# Altium PCB Chopper PMDC.PcbDoc (part 1 of 2)
Units mm, origin at the board's own origin, x right, y up, seen from the top; angles counter-clockwise.
Board outline 47.75 x 46.74 mm, 2 copper layers (Top Layer, Bottom Layer); 58 components, 29 nets, 163 pads, 6 vias.
Unrouted connection lines stored in the file: 2.
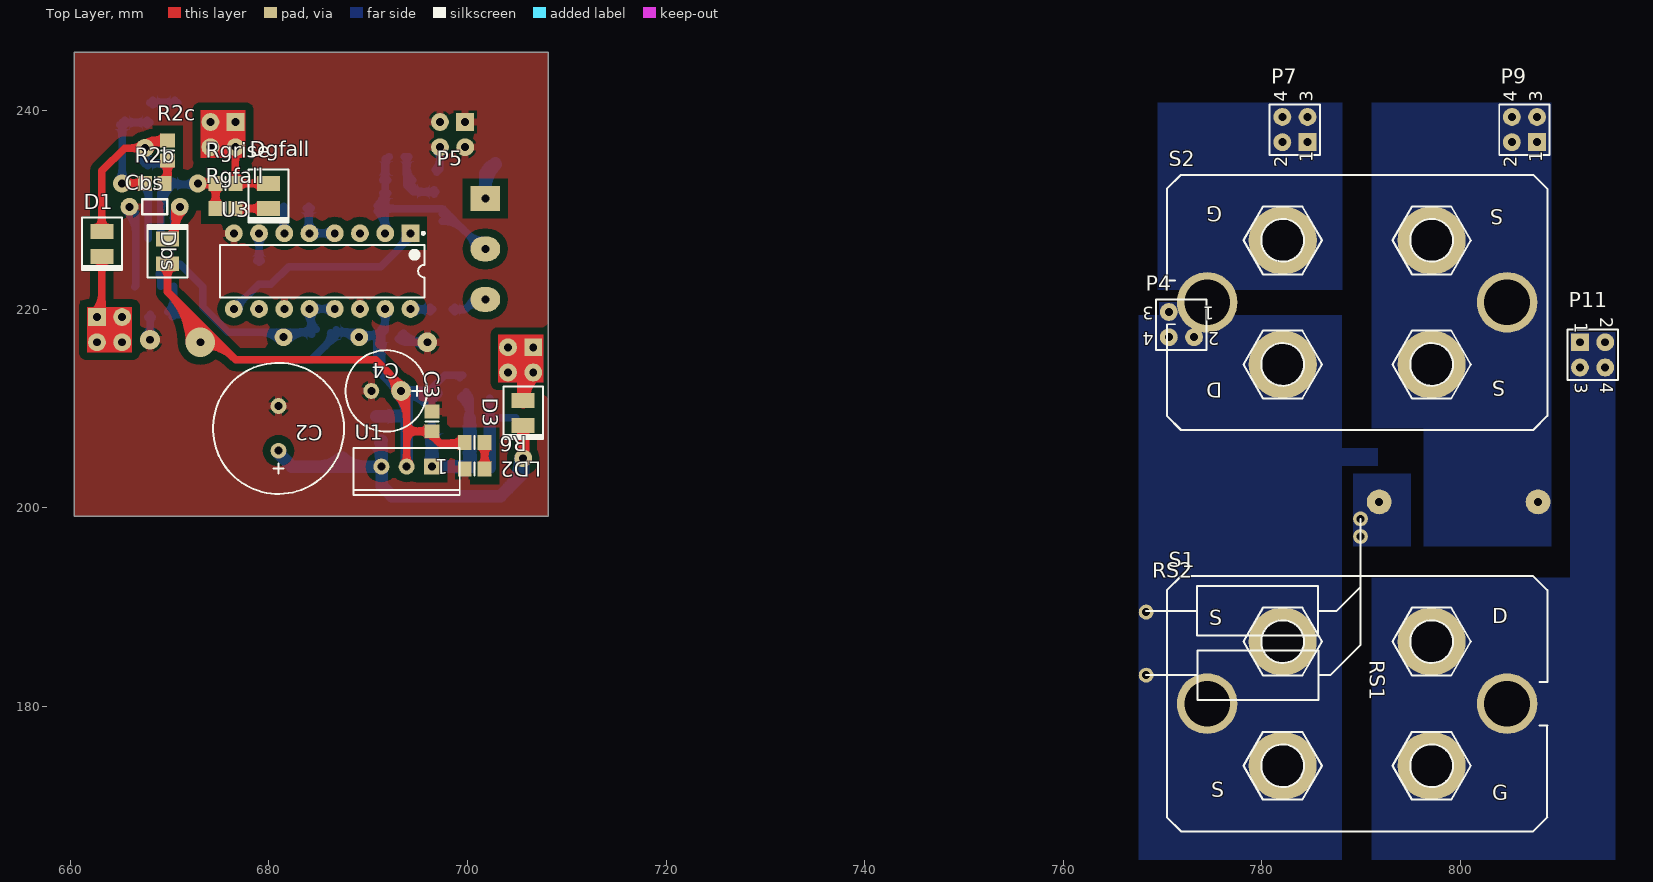
[diagram p0: Top Layer view]
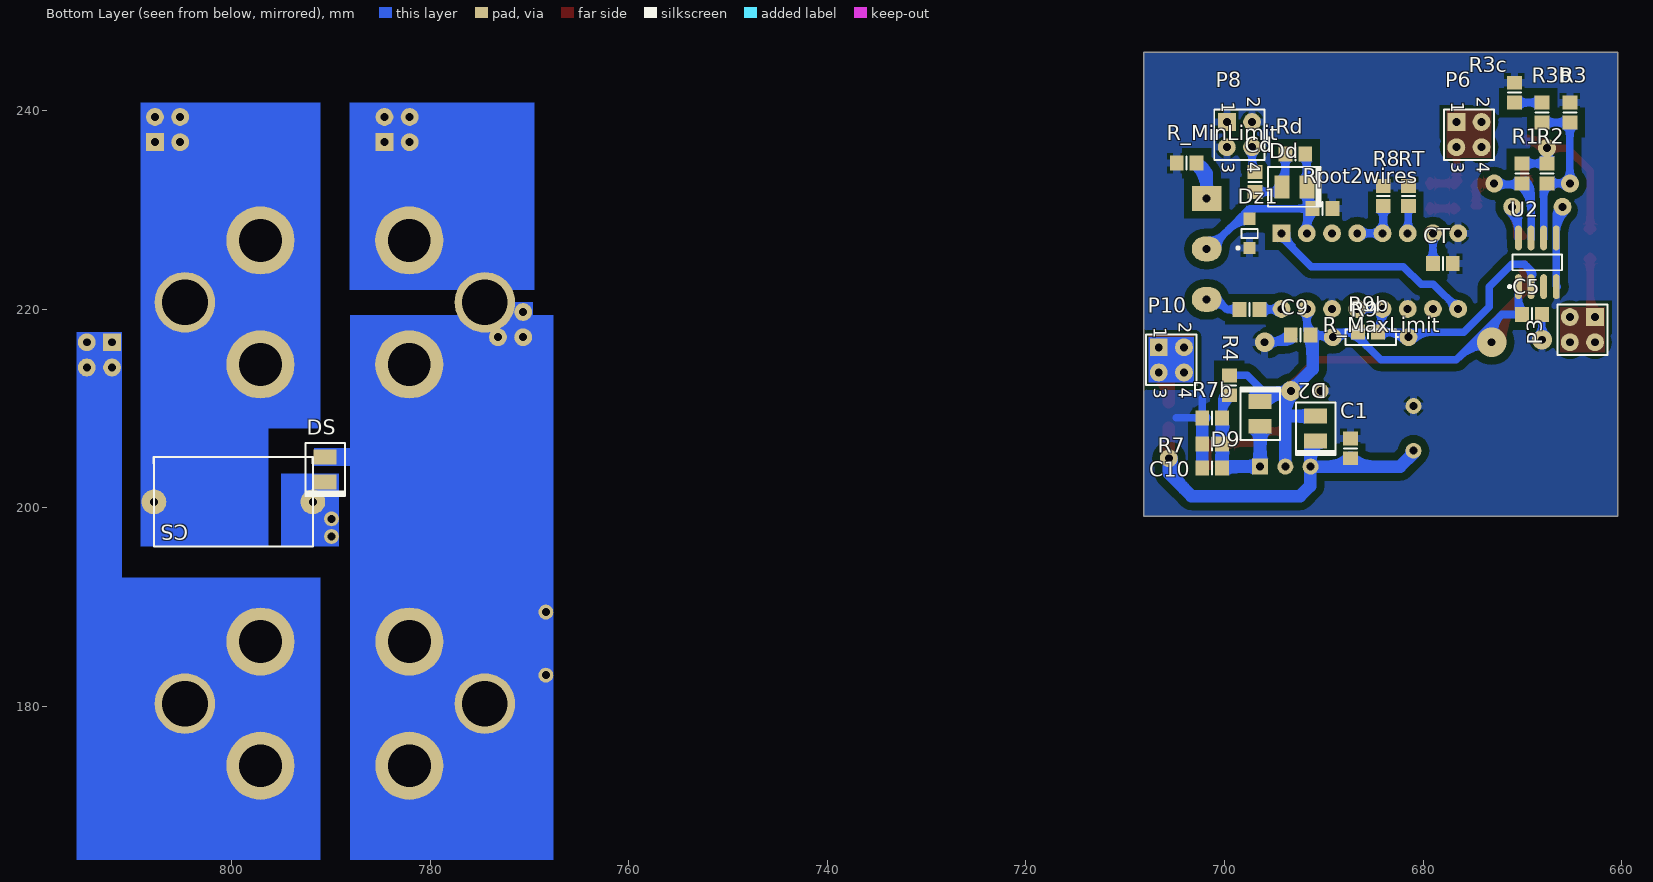
[diagram p1: Bottom Layer view, seen from below]

## Layer stack, top to bottom
Top Layer: signal copper 0.0356
Dielectric: dielectric 0.32, FR-4, Dk 4.8
Bottom Layer: signal copper 0.0356

## Board outline
660.4,245.872 660.4,199.136 708.152,199.136 708.152,245.872

## Design rules (kind name [scope] priority, off if disabled: settings)
Clearance [All] p1: gap=0.762
HoleSize [All] p1: absolutevalues=TRUE maxlimit=6 minlimit=0.8 maxpercent=80.000 minpercent=20.000
PlaneClearance [All] p1: clearance=1.016
PlaneConnect [All] p1: planeconnectstyle=Relief reliefexpansion=0.508 reliefentries=4 reliefconductorwidth=0.762 reliefairgap=0.254
PolygonConnect [All] p1: connectstyle=Relief reliefconductorwidth=0.762 reliefentries=4 polygonreliefangle="90 Angle"
RoutingVias [All] p1: holewidth=0.711 width=1.27 viastyle="Through Hole" minholewidth=0.711 minwidth=1.27 maxholewidth=0.711 maxwidth=1.27
SilkscreenOverComponentPads [IsPad] p1: minsilkscreentomaskgap=0.254
SolderMaskExpansion [All] p1: expansion=0.102
Width [All] p1: maxlimit=1.27 minlimit=0.254 preferedwidth=0.762
24 further rules are at their usual default settings.

## Components (designator, comment, footprint, x,y, rotation, side; value= is the part's Value field where it differs from the comment)
C1 "Cap" 6-0805_M 687.324,205.978 r270 bottom
C2 "Cap" CAPELTR-RAD6.6-DPP4.5 680.974,210.24 r270 top
C3 "Cap" 6-0805_M 696.417,208.696 r270 top
C4 "Cap" CAPELTR-RAD4.1-DPP3.0 690.321,211.76 r0 top
C5 "Cap" 6-0805_M 669.052,219.456 r180 bottom
C9 "Cap" 6-0805_M 692.337,217.398 r0 bottom
C10 "Cap" 6-0805_M 701.243,204.013 r180 bottom
Cbs "Cer" 100nF 665.963,230.302 r0 top
Cd "Cap" 6-0805_M 696.925,232.8 r90 bottom
CS "Cap" "CAPACITOR 4U7 100V" 807.82,213.084 r180 bottom
CT "Cap" 6-0805_M 678.018,224.587 r180 bottom
D1 "BYD77" SOD87 663.194,226.568 r270 top
D2 "BYD77" SOD87 690.829,207.967 r270 bottom
D3 "Diode 1N4002" SOD87 705.612,209.55 r270 top
D9 "1N4002" SOD87 696.417,209.457 r90 bottom
Dbs "" SOD87 669.798,225.823 r90 top
Dd "nc" SOD87 692.971,232.308 r180 bottom
Dgfall "BYD77" SOD87 679.958,231.394 r270 top
DS "BYD77" SOD87 790.575,203.852 r270 bottom
Dz1 "5V" ONSC-SOD-123FL-2-498_V 697.484,227.633 r90 bottom
LD2 "RED" 6-0805_M 700.735,203.886 r180 top
P3 "Header 2X2" HDR2X2 662.686,219.202 r0 bottom
P4 "Header 2X2" HDR2X2 773.176,219.71 r180 top
P5 "WE-Terminal Blocks Screw Type 691103110003" t-block 701.802,226.06 r270 top
P6 "Header 2X2" HDR2X2 676.656,238.844 r270 bottom
P7 "Header 2X2" HDR2X2 784.606,236.812 r90 top
P8 "Header 2X2" HDR2X2 699.77,238.844 r270 bottom
P9 "Header 2X2" HDR2X2 807.72,236.812 r90 top
P10 "Header 2X2" HDR2X2 706.628,216.154 r270 bottom
P11 "Header 2X2" HDR2X2 812.038,216.662 r270 top
R1 "1%" 6-0805_M 670.052,233.664 r270 bottom
R2 "1%" 6-0805_M 667.512,233.664 r270 bottom
R2b "1%" 6-0805_M 668.512,232.664 r180 top
R2c "1%" 6-0805_M 669.798,235.982 r270 top
R3 "1%" 6-0805_M 665.226,239.792 r90 bottom
R3b "1%" 6-0805_M 668.02,239.792 r90 bottom
R3c "1%" 6-0805_M 670.814,241.792 r270 bottom
R4 "Res1" 6-0805_M 699.516,212.328 r270 bottom
R6 "Res1" 6-0805_M 700.735,206.553 r180 top
R7 "Res1" 6-0805_M 701.243,206.426 r180 bottom
R7b "Res1" 6-0805_M 701.243,209.042 r180 bottom
R8 "Res1" 6-0805_M 684.022,231.378 r90 bottom
R9 "Res1" AXIAL-0.3 685.292,217.17 r180 bottom
R9b "Res1" 6-0805_M 685.546,217.678 r180 bottom
R_MaxLimit "Res1" 6-0805_M 697.484,219.964 r0 bottom
R_MinLimit "Res1" 6-0805_M 703.818,234.696 r0 bottom
Rd "Res1" 6-0805_M 692.877,235.61 r0 bottom
Rgfall "Res1" 6-0805_M 675.64,230.124 r180 top
Rgrise "Res1" 6-0805_M 675.64,232.664 r180 top
Rpot2wires "Res1" 6-0805_M 690.134,230.124 r180 bottom
RS1 "Res1" "Axial 0.8"#1 789.62,183.134 r180 top
RS2 "Res1" "Axial 0.8"#2 789.559,189.611 r180 top
RT "Res1" 6-0805_M 681.482,231.378 r90 bottom
S1 "IXFN420N10T" SOT-227B 789.597,180.264 r0 top
S2 "IXFN420N10T" SOT-227B 789.597,220.675 r180 top
U1 "TL783" TO-220AB 693.877,204.14 r180 top
U2 "IR2127S" SO8_M 668.503,224.714 r90 bottom
U3 "SG3524N" DIP-16 685.368,223.825 r270 top

## Footprints (in the part's own frame and the unit in brackets; to place one, negate y for a bottom-side part, rotate by r counter-clockwise, add the part's x,y. Pads: shape width x height; smd on the part's side, far side on the other; paste and mask are expansions set on the pad)
6-0805_M [mm] "Chip Resistor, Body 2.0x1.2mm, IPC Low Density"
  rect 1.4x1.5 smd: 1(-1,0) 2(1,0)
  silkscreen extent 0,-0.65 0,0.65, body extent -1.07,-0.7 1.07,0.7, height 0.7
100nF [mm]
  round 1.8 hole 0.8: 1(0,0) 2(5.08,0)
  silkscreen extent 1.27,-0.76 3.81,0.76
"Axial 0.8"#1 [mm]
  round 1.5 hole 0.8: 1(-0.32,-13.97) 2(21.27,0)
  silkscreen extent -0.32,-15.75 21.27,2.5
"Axial 0.8"#2 [mm]
  round 1.5 hole 0.8: 1(-0.381,-9.271) 2(21.209,0.127)
  silkscreen extent -0.38,-7.49 21.21,2.5
AXIAL-0.3 [mm] "Axial Device, Thru-Hole; 2 Leads; 0.3 in Pin Spacing"
  round 1.8 hole 0.8: 1(-3.81,0) 2(3.81,0)
  silkscreen extent -2.77,-0.76 2.77,0.76
"CAPACITOR 4U7 100V" [mm]
  round 2.5 hole 0.8: 1(0,-12.5) 2(16,-12.5)
  silkscreen extent 0,-17 16,-8
CAPELTR-RAD4.1-DPP3.0 [mm] "Capacitor Eletrolitico Radial 4.1mm com 3.0mm entre pinos"
  round 1.6 hole 0.8: 1(0,0)
  round 2 hole 0.8: 2(3,0)
  silkscreen extent -2.6,-4.1 5.6,4.1
CAPELTR-RAD6.6-DPP4.5 [mm] "Capacitor Eletrolitico Radial 6.6mm com 4.5mm entre pinos"
  round 1.6 hole 0.8: 1(0,0) 2(4.5,0)
  silkscreen extent -4.35,-6.6 8.85,6.6
DIP-16 [mm] "DIP; 16 Leads; Row Spacing 7.62 mm; Pitch 2.54 mm"
  rect 1.8x1.8 hole 0.8: 1(-3.81,8.89)
  round 1.8 hole 0.8: 2(-3.81,6.35) 3(-3.81,3.81) 4(-3.81,1.27) 5(-3.81,-1.27) 6(-3.81,-3.81) 7(-3.81,-6.35) 8(-3.81,-8.89) 9(3.81,-8.89) 10(3.81,-6.35) 11(3.81,-3.81) 12(3.81,-1.27) 13(3.81,1.27) 14(3.81,3.81) 15(3.81,6.35) 16(3.81,8.89)
  silkscreen extent -3.93,-10.3 2.65,10.32, body extent -3.6,-10.28 3.6,10.28, height 5.08
HDR2X2 [mm] "Connector; Header; 2x2 Position"
  rect 1.8x1.8 hole 0.8: 1(0,0)
  round 1.8 hole 0.8: 2(0,2.54) 3(2.54,0) 4(2.54,2.54)
  silkscreen extent -1.27,-1.27 3.81,3.81
ONSC-SOD-123FL-2-498_V [mm] "SOD, 2-Leads, Body 2.7x1.65mm"
  rect 1.25x1.22 smd: 1(-1.475,0) 2(1.475,0)
  silkscreen extent -1.6,-0.82 0.45,1.29, body extent -1.35,-0.82 1.35,0.82, height 0.98
SO8_M [mm] "SOIC, 8-Leads, Body 4.9x3.9mm, Pitch 1.27mm, IPC Low Density"
  oval 2.5x0.7 smd: 1(-2.45,1.905) 2(-2.45,0.635) 3(-2.45,-0.635) 4(-2.45,-1.905) 5(2.45,-1.905) 6(2.45,-0.635) 7(2.45,0.635) 8(2.45,1.905)
  silkscreen extent -2.57,-2.5 0.8,2.93, body extent -2,-2.5 2,2.5, height 1.75
SOD87 [mm]
  rect 1.5x2.3 smd: A(-1.253,0) K(1.253,0)
  silkscreen extent -2.65,-2.01 2.65,2.01
SOT-227B [mil] "SOT-227; 4 Screw Terminals, 2 Mounting Holes"
  round 270 hole 170 unplated: 1(-295.21,-246) 1(-295.21,246) 2(295,-246) 3(295,246)
  round 240.16 hole 181.1: MH1(-594.49,0) MH2(594.49,0)
  silkscreen extent -754,-506 754,506
t-block [mm]
  rect 2.5x3 hole 0.8 unplated: 1(-5.08,0)
  oval 2.5x3 hole 0.8 unplated: 2(0,0) 3(5.08,0)
TO-220AB [mm] "TO, Thru-Hole, Vertical, Heatsink Mounted; 3 In-Line Leads; Pitch 2.54 mm"
  rect 1.6x1.6 hole 0.8: 1(-2.54,0)
  round 1.6 hole 0.8: 2(0,0) 3(2.54,0)
  silkscreen extent -5.35,-1.85 5.35,2.85

## Part data
C1 C2 C3 C4 C5 C9 C10 Cd CS CT: "Capacitor"
Cbs: library part Cap, "Capacitor"
D1 D2 D9 Dbs Dd Dgfall: library part "Diode 1N4002", "1 Amp General Purpose Rectifier"
D3: "1 Amp General Purpose Rectifier"
DS: library part Diode, "Default Diode"
Dz1: library part "D Zener", "Zener Diode"
LD2: library part LED, "Diodo Emissor de Luz"
P3 P4 P6 P7 P8 P9 P10 P11: "Header, 2-Pin, Dual row"
P5: "WR-TBL 3.50 mm Wire Protector system"
R1 R2 R2b R2c R3 R3b R3c: library part Res1, "Resistor"
R4 R6 R7 R7b R8 R9 R9b R_MaxLimit R_MinLimit Rd Rgfall Rgrise Rpot2wires RS1 RS2 RT: "Resistor"
S1 S2: library part MOSFET-N, "N-Channel MOSFET"
U1: library part L7805ACV, "Precision 1A Regulator"
U2: "Current Sensing Single Channel Driver"
U3: "Regulating Pulse-Width Modulator with Voltage Control, 45 % Duty Cycle, 0 to +70 degC, 16-pin PDIP (N), Pb-Free (RoHS)"

## Free pads (board coordinates)
  round 1.8 hole 0.8: 0(705.612,204.978)

## Via types
v1: diameter 1.8, hole 0.8, Top Layer to Bottom Layer, 3 vias
v2: diameter 2, hole 0.8, Top Layer to Bottom Layer, 2 vias
v3: diameter 3, hole 0.8, Top Layer to Bottom Layer, 1 vias

## Nets (pads, with @x,y where several pads share a name; then routed paths per layer and width w, separated by ;. In a path a pad name is that pad's centre, name@x,y a point inside that pad or via, vN(x,y) a via of type N, cw(c..) or ccw(c..) an arc to the next point about the centre after c; other vN are vias at no path point)
+15V: C3.2 C4.2 C5.1 C9.1 D2.A D9.K Dbs.A R4.1 R6.2 R9.1 R9b.1 U1.2 U2.1 U3.15 | length 369.7
  Top Layer w0.762: C4.2@693.674,211.582 693.674,211.76 693.674,211.96 693.598,212.036 690.75,214.884 676.656,214.884 673.989,217.551 669.798,221.742 Dbs.A@669.798,224.57 669.798,223.774 ; U1.2@693.877,204.14 693.877,207.696 ; C4.2@693.928,211.836 693.877,211.887 693.877,211.76 693.877,207.696 ; C3.2@696.417,207.823 C3.2@696.417,207.696 ; R6.2@699.43,206.502 697.23,206.502 696.417,207.315 C3.2@696.417,207.696 ; Dbs.A@669.537,224.309 cw(c668.907,223.679) 669.798,223.679 ; Dbs.A@669.537,224.309 cw(c668.907,223.679) 669.798,223.679 ; Dbs.A@669.537,224.309 cw(c668.907,223.679) 669.798,223.679 ; Dbs.A@669.537,224.309 cw(c668.907,223.679) 669.798,223.679 ; Dbs.A@669.56,224.288 cw(c669.125,223.774) 669.798,223.774 ; Dbs.A@669.56,224.288 cw(c669.125,223.774) 669.798,223.774 ; Dbs.A@669.56,224.288 cw(c669.125,223.774) 669.798,223.774 ; Dbs.A@669.56,224.288 cw(c669.125,223.774) 669.798,223.774 ; 669.798,223.679 cw(c670.689,223.679) Dbs.A@670.059,224.309 ; 669.798,223.679 cw(c670.689,223.679) Dbs.A@670.059,224.309 ; 669.798,223.679 cw(c670.689,223.679) Dbs.A@670.059,224.309 ; 669.798,223.679 cw(c670.689,223.679) Dbs.A@670.059,224.309 ; 669.798,223.774 cw(c670.471,223.774) Dbs.A@670.036,224.288 ; 669.798,223.774 cw(c670.471,223.774) Dbs.A@670.036,224.288 ; 669.798,223.774 cw(c670.471,223.774) Dbs.A@670.036,224.288 ; 669.798,223.774 cw(c670.471,223.774) Dbs.A@670.036,224.288 ; 669.933,221.607 cw(c664.987,216.662) v3@671.981,216.662 ; 669.933,221.607 cw(c664.987,216.662) v3@671.981,216.662 ; 669.933,221.607 cw(c664.987,216.662) v3@671.981,216.662 ; 669.933,221.607 cw(c664.987,216.662) v3@671.981,216.662 ; 671.233,220.307 cw(c667.589,216.662) v3@672.743,216.662 ; 671.233,220.307 cw(c667.589,216.662) v3@672.743,216.662 ; 671.233,220.307 cw(c667.589,216.662) v3@672.743,216.662 ; 671.233,220.307 cw(c667.589,216.662) v3@672.743,216.662 ; 672.534,219.006 cw(c670.19,216.662) v3@673.505,216.662 ; 672.534,219.006 cw(c670.19,216.662) v3@673.505,216.662 ; 672.534,219.006 cw(c670.19,216.662) v3@673.505,216.662 ; 672.534,219.006 cw(c670.19,216.662) v3@673.505,216.662 ; v3@673.061,217.065 cw(c673.327,214.339) 675.264,216.276 ; v3@673.061,217.065 cw(c673.327,214.339) 675.264,216.276 ; v3@673.061,217.065 cw(c673.327,214.339) 675.264,216.276 ; v3@673.061,217.065 cw(c673.327,214.339) 675.264,216.276 ; v3@673.135,216.307 cw(c673.53,212.261) 676.405,215.135 ; v3@673.135,216.307 cw(c673.53,212.261) 676.405,215.135 ; v3@673.135,216.307 cw(c673.53,212.261) 676.405,215.135 ; v3@673.135,216.307 cw(c673.53,212.261) 676.405,215.135 ; 691.873,213.761 cw(c689.872,211.76) C4.2@692.702,211.76 ; 691.873,213.761 cw(c689.872,211.76) C4.2@692.702,211.76 ; 691.873,213.761 cw(c689.872,211.76) C4.2@692.702,211.76 ; 691.873,213.761 cw(c689.872,211.76) C4.2@692.702,211.76 ; C4.2@692.883,211.322 cw(c690.484,208.923) 693.877,208.923 ; C4.2@692.883,211.322 cw(c690.484,208.923) 693.877,208.923 ; C4.2@692.883,211.322 cw(c690.484,208.923) 693.877,208.923 ; C4.2@692.883,211.322 cw(c690.484,208.923) 693.877,208.923 ; C4.2@693.422,211.861 cw(c692.324,210.763) 693.877,210.763 ; C4.2@693.422,211.861 cw(c692.324,210.763) 693.877,210.763 ; C4.2@693.422,211.861 cw(c692.324,210.763) 693.877,210.763 ; C4.2@693.422,211.861 cw(c692.324,210.763) 693.877,210.763 ; U1.2@693.581,204.436 ccw(c692.866,205.151) 693.877,205.151 ; U1.2@693.581,204.436 ccw(c692.866,205.151) 693.877,205.151 ; U1.2@693.581,204.436 ccw(c692.866,205.151) 693.877,205.151 ; U1.2@693.581,204.436 ccw(c692.866,205.151) 693.877,205.151 ; 693.877,205.151 ccw(c694.889,205.151) U1.2@694.173,204.436 ; 693.877,205.151 ccw(c694.889,205.151) U1.2@694.173,204.436 ; 693.877,205.151 ccw(c694.889,205.151) U1.2@694.173,204.436 ; 693.877,205.151 ccw(c694.889,205.151) U1.2@694.173,204.436 ; 693.877,207.696 C3.2@696.417,207.696 ; 695.597,207.696 cw(c695.597,206.926) C3.2@696.142,207.47 ; 695.597,207.696 ccw(c695.597,208.466) C3.2@696.142,207.921 ; 695.597,207.696 ccw(c695.597,208.466) C3.2@696.142,207.921 ; 695.597,207.696 cw(c695.597,206.926) C3.2@696.142,207.47 ; 695.597,207.696 ccw(c695.597,208.466) C3.2@696.142,207.921 ; 695.597,207.696 cw(c695.597,206.926) C3.2@696.142,207.47 ; 695.597,207.696 ccw(c695.597,208.466) C3.2@696.142,207.921 ; 695.597,207.696 cw(c695.597,206.926) C3.2@696.142,207.47 ; C3.2@696.775,207.613 ccw(c697.669,207.372) 697.014,206.718 ; C3.2@696.775,207.613 ccw(c697.669,207.372) 697.014,206.718 ; C3.2@696.775,207.613 ccw(c697.669,207.372) 697.014,206.718 ; C3.2@696.775,207.613 ccw(c697.669,207.372) 697.014,206.718 ; 698.963,206.502 ccw(c698.963,207.275) R6.2@699.51,206.728 ; 698.963,206.502 ccw(c698.963,207.275) R6.2@699.51,206.728 ; 698.963,206.502 ccw(c698.963,207.275) R6.2@699.51,206.728 ; 698.963,206.502 ccw(c698.963,207.275) R6.2@699.51,206.728 ; 698.967,206.502 cw(c698.967,205.735) R6.2@699.51,206.277 ; 698.967,206.502 cw(c698.967,205.735) R6.2@699.51,206.277 ; 698.967,206.502 cw(c698.967,205.735) R6.2@699.51,206.277 ; 698.967,206.502 cw(c698.967,205.735) R6.2@699.51,206.277
  Bottom Layer w0.762: C5.1@670.408,219.862 U2.1@670.408,222.264 U2.1@670.408,222.314 ; 670.814,219.456 672.084,219.456 673.989,217.551 676.656,214.884 684.276,214.884 686.808,217.416 R9b.1@687.07,217.678 ; U3.15@691.718,220.015 691.718,217.856 691.299,217.436 691.21,217.348 691.134,217.348 689.102,217.348 688.772,217.678 R9b.1@687.07,217.678 ; C4.2@693.536,211.974 C4.2@693.547,211.963 ; 693.598,209.22 693.877,209.22 ; D9.K@696.417,210.71 696.417,211.582 ; R4.1@699.516,213.36 697.738,213.36 696.417,212.039 696.417,211.582 ; C5.1@669.826,219.732 ccw(c668.423,221.135) U2.1@670.408,221.135 ; C5.1@669.826,219.732 ccw(c668.423,221.135) U2.1@670.408,221.135 ; C5.1@669.826,219.732 ccw(c668.423,221.135) U2.1@670.408,221.135 ; C5.1@669.826,219.732 ccw(c668.423,221.135) U2.1@670.408,221.135 ; C5.1@670.278,219.23 cw(c670.822,218.686) 670.822,219.456 ; C5.1@670.278,219.23 cw(c670.822,218.686) 670.822,219.456 ; C5.1@670.278,219.23 cw(c670.822,218.686) 670.822,219.456 ; C5.1@670.278,219.23 cw(c670.822,218.686) 670.822,219.456 ; C5.1@670.278,219.682 ccw(c670.822,220.226) 670.822,219.456 ; C5.1@670.278,219.682 ccw(c670.822,220.226) 670.822,219.456 ; C5.1@670.278,219.682 ccw(c670.822,220.226) 670.822,219.456 ; C5.1@670.278,219.682 ccw(c670.822,220.226) 670.822,219.456 ; 672.091,219.449 cw(c670.195,217.553) v3@672.759,216.767 ; 672.091,219.449 cw(c670.195,217.553) v3@672.759,216.767 ; 672.091,219.449 cw(c670.195,217.553) v3@672.759,216.767 ; 672.091,219.449 cw(c670.195,217.553) v3@672.759,216.767 ; 672.987,218.553 cw(c671.566,217.132) v3@673.487,216.543 ; 672.987,218.553 cw(c671.566,217.132) v3@673.487,216.543 ; 672.987,218.553 cw(c671.566,217.132) v3@673.487,216.543 ; 672.987,218.553 cw(c671.566,217.132) v3@673.487,216.543 ; v3@673.061,217.065 cw(c673.327,214.339) 675.264,216.276 ; v3@673.061,217.065 cw(c673.327,214.339) 675.264,216.276 ; v3@673.061,217.065 cw(c673.327,214.339) 675.264,216.276 ; v3@673.061,217.065 cw(c673.327,214.339) 675.264,216.276 ; v3@673.135,216.307 cw(c673.53,212.261) 676.405,215.135 ; v3@673.135,216.307 cw(c673.53,212.261) 676.405,215.135 ; v3@673.135,216.307 cw(c673.53,212.261) 676.405,215.135 ; v3@673.135,216.307 cw(c673.53,212.261) 676.405,215.135 ; 685.666,216.274 ccw(c684.313,217.628) R9b.1@686.227,217.628 ; 685.666,216.274 ccw(c684.313,217.628) R9b.1@686.227,217.628 ; 685.666,216.274 ccw(c684.313,217.628) R9b.1@686.227,217.628 ; 685.666,216.274 ccw(c684.313,217.628) R9b.1@686.227,217.628 ; R9b.1@686.772,217.452 cw(c687.316,216.908) 687.316,217.678 ; R9b.1@686.772,217.452 cw(c687.316,216.908) 687.316,217.678 ; R9b.1@686.772,217.452 cw(c687.316,216.908) 687.316,217.678 ; R9b.1@686.772,217.452 cw(c687.316,216.908) 687.316,217.678 ; R9b.1@686.772,217.904 ccw(c687.316,218.448) 687.316,217.678 ; R9b.1@686.772,217.904 ccw(c687.316,218.448) 687.316,217.678 ; R9b.1@686.772,217.904 ccw(c687.316,218.448) 687.316,217.678 ; R9b.1@686.772,217.904 ccw(c687.316,218.448) 687.316,217.678 ; R9b.1@687.07,217.678 cw(c687.07,215.673) R9.1@688.684,216.862 ; R9b.1@687.07,217.678 cw(c687.07,215.673) R9.1@688.684,216.862 ; R9b.1@687.07,217.678 cw(c687.07,215.673) R9.1@688.684,216.862 ; R9b.1@687.07,217.678 cw(c687.07,215.673) R9.1@688.684,216.862 ; R9.1@689.469,216.803 cw(c690.784,215.488) C9.1@690.784,217.348 ; R9.1@689.469,216.803 cw(c690.784,215.488) C9.1@690.784,217.348 ; R9.1@689.469,216.803 cw(c690.784,215.488) C9.1@690.784,217.348 ; R9.1@689.469,216.803 cw(c690.784,215.488) C9.1@690.784,217.348 ; 690.567,217.348 cw(c690.567,216.578) C9.1@691.112,217.122 ; 690.567,217.348 ccw(c690.567,218.118) C9.1@691.112,217.573 ; 690.567,217.348 ccw(c690.567,218.118) C9.1@691.112,217.573 ; 690.567,217.348 cw(c690.567,216.578) C9.1@691.112,217.122 ; 690.567,217.348 ccw(c690.567,218.118) C9.1@691.112,217.573 ; 690.567,217.348 cw(c690.567,216.578) C9.1@691.112,217.122 ; 690.567,217.348 ccw(c690.567,218.118) C9.1@691.112,217.573 ; 690.567,217.348 cw(c690.567,216.578) C9.1@691.112,217.122 ; C9.1@691.112,217.673 ccw(c689.647,219.138) U3.15@691.718,219.138 ; C9.1@691.112,217.673 ccw(c689.647,219.138) U3.15@691.718,219.138 ; C9.1@691.112,217.673 ccw(c689.647,219.138) U3.15@691.718,219.138 ; C9.1@691.112,217.673 ccw(c689.647,219.138) U3.15@691.718,219.138 ; U3.15@691.351,219.648 cw(c690.465,218.762) 691.718,218.762 ; U3.15@691.351,219.648 cw(c690.465,218.762) 691.718,218.762 ; U3.15@691.351,219.648 cw(c690.465,218.762) 691.718,218.762 ; U3.15@691.351,219.648 cw(c690.465,218.762) 691.718,218.762 ; 691.718,218.762 cw(c692.971,218.762) U3.15@692.085,219.648 ; 691.718,218.762 cw(c692.971,218.762) U3.15@692.085,219.648 ; 691.718,218.762 cw(c692.971,218.762) U3.15@692.085,219.648 ; 691.718,218.762 cw(c692.971,218.762) U3.15@692.085,219.648 ; D9.K@696.156,210.971 ccw(c695.526,211.601) 696.417,211.601 ; D9.K@696.156,210.971 ccw(c695.526,211.601) 696.417,211.601 ; D9.K@696.156,210.971 ccw(c695.526,211.601) 696.417,211.601 ; D9.K@696.156,210.971 ccw(c695.526,211.601) 696.417,211.601 ; D9.K@696.16,210.975 ccw(c695.572,211.582) 696.417,211.582 ; D9.K@696.16,210.975 ccw(c695.572,211.582) 696.417,211.582 ; D9.K@696.16,210.975 ccw(c695.572,211.582) 696.417,211.582 ; D9.K@696.16,210.975 ccw(c695.572,211.582) 696.417,211.582 ; D9.K@696.16,210.975 ccw(c695.572,211.582) 696.417,211.582 ; D9.K@696.16,210.975 ccw(c695.572,211.582) 696.417,211.582 ; D9.K@696.16,210.975 ccw(c695.572,211.582) 696.417,211.582 ; D9.K@696.16,210.975 ccw(c695.572,211.582) 696.417,211.582 ; 696.417,211.582 ccw(c697.262,211.582) D9.K@696.674,210.975 ; 696.417,211.582 ccw(c697.262,211.582) D9.K@696.674,210.975 ; 696.417,211.582 ccw(c697.262,211.582) D9.K@696.674,210.975 ; 696.417,211.582 ccw(c697.262,211.582) D9.K@696.674,210.975 ; 696.417,211.582 ccw(c697.262,211.582) D9.K@696.674,210.975 ; 696.417,211.582 ccw(c697.262,211.582) D9.K@696.674,210.975 ; 696.417,211.582 ccw(c697.262,211.582) D9.K@696.674,210.975 ; 696.417,211.582 ccw(c697.262,211.582) D9.K@696.674,210.975 ; 696.417,211.601 ccw(c697.308,211.601) D9.K@696.678,210.971 ; 696.417,211.601 ccw(c697.308,211.601) D9.K@696.678,210.971 ; 696.417,211.601 ccw(c697.308,211.601) D9.K@696.678,210.971 ; 696.417,211.601 ccw(c697.308,211.601) D9.K@696.678,210.971 ; 698.619,213.36 cw(c698.619,212.481) R4.1@699.24,213.102 ; 698.619,213.36 cw(c698.619,212.481) R4.1@699.24,213.102 ; 698.619,213.36 cw(c698.619,212.481) R4.1@699.24,213.102 ; 698.619,213.36 cw(c698.619,212.481) R4.1@699.24,213.102
  Bottom Layer w1.27: D2.A@690.829,209.22 693.598,209.22 ; C9.1@691.134,217.424 691.134,217.398 691.134,217.348 691.134,213.947 C4.2@693.321,211.76 ; C4.2@693.42,211.836 C4.2@693.674,211.582 ; U1.2@693.877,204.14 693.877,209.22 693.877,211.379 C4.2@693.674,211.582 ; 696.417,211.582 C4.2@693.674,211.582 ; C4.2@693.063,211.502 cw(c691.098,209.536) 693.877,209.536 ; C4.2@693.063,211.502 cw(c691.098,209.536) 693.877,209.536 ; C4.2@693.063,211.502 cw(c691.098,209.536) 693.877,209.536 ; C4.2@693.063,211.502 cw(c691.098,209.536) 693.877,209.536 ; C4.2@693.579,212.018 ccw(c694.632,213.07) 694.632,211.582 ; C4.2@693.579,212.018 ccw(c694.632,213.07) 694.632,211.582 ; C4.2@693.579,212.018 ccw(c694.632,213.07) 694.632,211.582 ; C4.2@693.579,212.018 ccw(c694.632,213.07) 694.632,211.582 ; C4.2@693.674,211.582 cw(c693.674,208.422) D9.K@695.935,210.63 ; C4.2@693.674,211.582 cw(c693.674,208.422) D9.K@695.935,210.63 ; C4.2@693.674,211.582 cw(c693.674,208.422) D9.K@695.935,210.63 ; C4.2@693.674,211.582 cw(c693.674,208.422) D9.K@695.935,210.63 ; 696.69,211.582 cw(c696.69,211.367) 696.844,211.517 ; 696.69,211.582 cw(c696.69,211.367) 696.844,211.517 ; 696.69,211.582 cw(c696.69,211.367) 696.844,211.517 ; 696.69,211.582 cw(c696.69,211.367) 696.844,211.517
  other v3: 673.1,216.662
+24V: D3.A P10.1 P10.2 P10.3 P10.4 P11.1 P11.2 P11.3 P11.4 S1.3 | length 26.3
  Top Layer w1.27: D3.A@705.612,210.803 705.612,212.598 P10.3@706.628,213.614 ; D3.A@705.612,210.625 cw(c709.474,210.625) P10.3@706.811,213.422 ; D3.A@705.612,210.625 cw(c709.474,210.625) P10.3@706.811,213.422 ; D3.A@705.612,210.625 cw(c709.474,210.625) P10.3@706.811,213.422 ; D3.A@705.612,210.625 cw(c709.474,210.625) P10.3@706.811,213.422 ; 705.612,212.177 cw(c706.793,212.177) P10.3@706.658,213.351 ; 705.612,212.177 cw(c706.793,212.177) P10.3@706.658,213.351 ; 705.612,212.177 cw(c706.793,212.177) P10.3@706.658,213.351 ; 705.612,212.177 cw(c706.793,212.177) P10.3@706.658,213.351
  Bottom Layer w1.27: P10.4@704.088,214.376 704.596,214.376 ; 705.612,213.591 cw(c706.648,213.591) 705.985,214.386 ; P11.3@812.038,214.122 P11.4@814.324,214.122
FAULT: U2.3
GATE: Dgfall.A P6.1 P6.2 P6.3 P6.4 Rgrise.1 | length 29.2
  Top Layer w0.762: P6.3@676.64,235.95 Rgrise.1@676.64,232.664 Dgfall.A@679.45,232.664 ; P6.3@676.289,235.937 cw(c675.442,235.09) 676.64,235.09 ; P6.3@676.289,235.937 cw(c675.442,235.09) 676.64,235.09 ; P6.3@676.289,235.937 cw(c675.442,235.09) 676.64,235.09 ; P6.3@676.289,235.937 cw(c675.442,235.09) 676.64,235.09 ; Rgrise.1@676.414,232.94 ccw(c675.87,233.484) 676.64,233.484 ; Rgrise.1@676.414,232.94 ccw(c675.87,233.484) 676.64,233.484 ; Rgrise.1@676.414,232.94 ccw(c675.87,233.484) 676.64,233.484 ; Rgrise.1@676.414,232.94 ccw(c675.87,233.484) 676.64,233.484 ; 676.64,233.484 ccw(c677.41,233.484) Rgrise.1@676.866,232.94 ; 676.64,233.484 ccw(c677.41,233.484) Rgrise.1@676.866,232.94 ; 676.64,233.484 ccw(c677.41,233.484) Rgrise.1@676.866,232.94 ; 676.64,233.484 ccw(c677.41,233.484) Rgrise.1@676.866,232.94 ; 676.64,235.013 cw(c677.948,235.013) P6.3@677.023,235.937 ; 676.64,235.013 cw(c677.948,235.013) P6.3@677.023,235.937 ; 676.64,235.013 cw(c677.948,235.013) P6.3@677.023,235.937 ; 676.64,235.013 cw(c677.948,235.013) P6.3@677.023,235.937 ; Rgrise.1@676.866,232.438 cw(c677.41,231.894) 677.41,232.664 ; Rgrise.1@676.866,232.438 cw(c677.41,231.894) 677.41,232.664 ; Rgrise.1@676.866,232.438 cw(c677.41,231.894) 677.41,232.664 ; Rgrise.1@676.866,232.438 cw(c677.41,231.894) 677.41,232.664 ; Rgrise.1@676.866,232.89 ccw(c677.41,233.434) 677.41,232.664 ; Rgrise.1@676.866,232.89 ccw(c677.41,233.434) 677.41,232.664 ; Rgrise.1@676.866,232.89 ccw(c677.41,233.434) 677.41,232.664 ; Rgrise.1@676.866,232.89 ccw(c677.41,233.434) 677.41,232.664 ; 678.627,232.664 cw(c678.627,231.716) Dgfall.A@679.297,232.386 ; 678.627,232.664 cw(c678.627,231.716) Dgfall.A@679.297,232.386 ; 678.627,232.664 cw(c678.627,231.716) Dgfall.A@679.297,232.386 ; 678.627,232.664 cw(c678.627,231.716) Dgfall.A@679.297,232.386 ; 678.708,232.664 ccw(c678.708,233.497) Dgfall.A@679.297,232.908 ; 678.708,232.664 ccw(c678.708,233.497) Dgfall.A@679.297,232.908 ; 678.708,232.664 ccw(c678.708,233.497) Dgfall.A@679.297,232.908 ; 678.708,232.664 ccw(c678.708,233.497) Dgfall.A@679.297,232.908
NetC1_2: C1.2 C2.2 D2.K D3.K pad.0 U1.3 | length 72.6
  Top Layer w1.27: pad.0@705.612,204.978 D3.K@705.612,208.026
  Bottom Layer w0.762: C2.2@680.974,205.74 C2.2@681.101,205.613 ; D2.K@690.956,206.553 D2.K@691.337,206.172 ; U1.3@691.337,203.505 U1.3@691.337,204.14 691.337,204.216 U1.3@691.388,204.216
  Bottom Layer w1.27: C2.2@680.974,205.486 682.32,204.14 687.324,204.14 U1.3@691.337,204.14 ; U1.3@691.337,204.216 691.337,206.172 691.337,206.705 D2.K@691.388,206.756 ; U1.3@691.388,203.962 691.388,202.184 692.404,201.168 703.326,201.168 705.612,203.454 pad.0@705.612,204.978 ; C2.2@681.139,205.74 ccw(c682.151,205.74) 681.435,205.025 ; C2.2@681.139,205.74 ccw(c682.151,205.74) 681.435,205.025 ; C2.2@681.139,205.74 ccw(c682.151,205.74) 681.435,205.025 ; C2.2@681.139,205.74 ccw(c682.151,205.74) 681.435,205.025 ; 685.093,204.14 ccw(c685.093,207.159) C1.2@687.228,205.024 ; 685.093,204.14 ccw(c685.093,207.159) C1.2@687.228,205.024 ; 685.093,204.14 ccw(c685.093,207.159) C1.2@687.228,205.024 ; 685.093,204.14 ccw(c685.093,207.159) C1.2@687.228,205.024 ; C1.2@687.42,205.024 ccw(c689.555,207.159) 689.555,204.14 ; C1.2@687.42,205.024 ccw(c689.555,207.159) 689.555,204.14 ; C1.2@687.42,205.024 ccw(c689.555,207.159) 689.555,204.14 ; C1.2@687.42,205.024 ccw(c689.555,207.159) 689.555,204.14 ; 704.088,201.93 ccw(c701.049,204.969) pad.0@705.347,204.977 ; 704.088,201.93 ccw(c701.049,204.969) pad.0@705.347,204.977 ; 704.088,201.93 ccw(c701.049,204.969) pad.0@705.347,204.977 ; 704.088,201.93 ccw(c701.049,204.969) pad.0@705.347,204.977
NetC10_2: C10.2 D9.A R4.2 R7.2 R7b.2 U1.1 | length 32.8
  Bottom Layer w0.762: D9.A@696.417,207.975 D9.A@696.417,208.204 D9.A@696.417,208.331 ; R4.2@699.516,211.328 700.278,210.566 R7b.2@700.278,209.042 ; C10.2@700.202,204.14 C10.2@700.243,204.14 ; R7b.2@700.243,209.007 R7b.2@700.243,209.042 R7b.2@700.243,209.49 ; R4.2@699.347,211.096 cw(c697.302,208.934) R7b.2@700.278,208.934 ; R4.2@699.347,211.096 cw(c697.302,208.934) R7b.2@700.278,208.934 ; R4.2@699.347,211.096 cw(c697.302,208.934) R7b.2@700.278,208.934 ; R4.2@699.347,211.096 cw(c697.302,208.934) R7b.2@700.278,208.934 ; R4.2@699.87,211.65 cw(c698.975,210.703) 700.278,210.703 ; R4.2@699.87,211.65 cw(c698.975,210.703) 700.278,210.703 ; R4.2@699.87,211.65 cw(c698.975,210.703) 700.278,210.703 ; R4.2@699.87,211.65 cw(c698.975,210.703) 700.278,210.703 ; R7b.2@700.018,209.318 ccw(c699.389,209.946) 700.278,209.946 ; R7b.2@700.018,209.318 ccw(c699.389,209.946) 700.278,209.946 ; R7b.2@700.018,209.318 ccw(c699.389,209.946) 700.278,209.946 ; R7b.2@700.018,209.318 ccw(c699.389,209.946) 700.278,209.946
  Bottom Layer w1.27: D9.A@696.417,207.975 U1.1@696.417,204.14 C10.2@700.202,204.14 ; C10.2@700.243,204.013 700.243,204.14 R7.2@700.243,206.426 R7b.2@700.243,209.007
NetCbs_2: Cbs.2 Dbs.K U2.8 | length 38.1
  Top Layer w0.762: Dbs.K@670.56,227.33 670.56,229.819 Cbs.2@671.043,230.302 ; Dbs.K@669.937,227.337 ccw(c668.433,228.841) 670.56,228.841 ; Dbs.K@669.937,227.337 ccw(c668.433,228.841) 670.56,228.841 ; Dbs.K@669.937,227.337 ccw(c668.433,228.841) 670.56,228.841 ; Dbs.K@669.937,227.337 ccw(c668.433,228.841) 670.56,228.841 ; 670.56,227.884 cw(c673.461,227.884) Cbs.2@671.41,229.935 ; 670.56,227.884 cw(c673.461,227.884) Cbs.2@671.41,229.935 ; 670.56,227.884 cw(c673.461,227.884) Cbs.2@671.41,229.935 ; 670.56,227.884 cw(c673.461,227.884) Cbs.2@671.41,229.935
  Bottom Layer w0.762: U2.8@670.408,227.114 U2.8@670.408,227.164 670.408,229.794 Cbs.2@670.941,230.327 ; U2.8@670.408,227.516 cw(c673.829,227.516) Cbs.2@671.41,229.935 ; U2.8@670.408,227.516 cw(c673.829,227.516) Cbs.2@671.41,229.935 ; U2.8@670.408,227.516 cw(c673.829,227.516) Cbs.2@671.41,229.935 ; U2.8@670.408,227.516 cw(c673.829,227.516) Cbs.2@671.41,229.935 ; 670.408,229.355 cw(c671.989,229.355) Cbs.2@670.871,230.474 ; 670.408,229.355 cw(c671.989,229.355) Cbs.2@670.871,230.474 ; 670.408,229.355 cw(c671.989,229.355) Cbs.2@670.871,230.474 ; 670.408,229.355 cw(c671.989,229.355) Cbs.2@670.871,230.474
NetCd_1: Cd.1 Dd.A Rd.2 | length 26.6
  Bottom Layer w0.762: Rd.2@693.877,235.356 693.877,232.461 694.127,232.211 694.538,231.8 Cd.1@696.824,231.8 ; Dd.A@694.225,232.308 Dd.A@694.538,232.308 ; Rd.2@693.652,235.335 cw(c693.107,234.79) 693.877,234.79 ; Rd.2@693.652,235.335 cw(c693.107,234.79) 693.877,234.79 ; Rd.2@693.652,235.335 cw(c693.107,234.79) 693.877,234.79 ; Rd.2@693.652,235.335 cw(c693.107,234.79) 693.877,234.79 ; 693.877,234.438 ccw(c695.954,234.438) Dd.A@694.486,232.969 ; 693.877,234.438 ccw(c695.954,234.438) Dd.A@694.486,232.969 ; 693.877,234.438 ccw(c695.954,234.438) Dd.A@694.486,232.969 ; 693.877,234.438 ccw(c695.954,234.438) Dd.A@694.486,232.969 ; 693.877,234.79 cw(c694.647,234.79) Rd.2@694.103,235.335 ; 693.877,234.79 cw(c694.647,234.79) Rd.2@694.103,235.335 ; 693.877,234.79 cw(c694.647,234.79) Rd.2@694.103,235.335 ; 693.877,234.79 cw(c694.647,234.79) Rd.2@694.103,235.335 ; Dd.A@694.486,232.169 ccw(c695.376,233.06) 695.376,231.8 ; Dd.A@694.486,232.169 ccw(c695.376,233.06) 695.376,231.8 ; Dd.A@694.486,232.169 ccw(c695.376,233.06) 695.376,231.8 ; Dd.A@694.486,232.169 ccw(c695.376,233.06) 695.376,231.8 ; 696.105,231.8 cw(c696.105,231.03) Cd.1@696.65,231.575 ; 696.105,231.8 ccw(c696.105,232.571) Cd.1@696.65,232.026 ; 696.105,231.8 ccw(c696.105,232.571) Cd.1@696.65,232.026 ; 696.105,231.8 cw(c696.105,231.03) Cd.1@696.65,231.575 ; 696.105,231.8 ccw(c696.105,232.571) Cd.1@696.65,232.026 ; 696.105,231.8 cw(c696.105,231.03) Cd.1@696.65,231.575 ; 696.105,231.8 ccw(c696.105,232.571) Cd.1@696.65,232.026 ; 696.105,231.8 cw(c696.105,231.03) Cd.1@696.65,231.575
NetCs_2: CS.2 DS.K RS1.1 RS2.1
NetCT_1: CT.1 U3.7 | length 15.6
  Bottom Layer w0.762: CT.1@679.018,224.714 U3.7@679.018,227.635 ; U3.7@678.651,227.268 cw(c677.765,226.382) 679.018,226.382 ; U3.7@678.651,227.268 cw(c677.765,226.382) 679.018,226.382 ; U3.7@678.651,227.268 cw(c677.765,226.382) 679.018,226.382 ; U3.7@678.651,227.268 cw(c677.765,226.382) 679.018,226.382 ; CT.1@678.793,224.862 ccw(c678.248,225.407) 679.018,225.407 ; CT.1@678.793,224.862 ccw(c678.248,225.407) 679.018,225.407 ; CT.1@678.793,224.862 ccw(c678.248,225.407) 679.018,225.407 ; CT.1@678.793,224.862 ccw(c678.248,225.407) 679.018,225.407 ; 679.018,225.407 ccw(c679.788,225.407) CT.1@679.244,224.862 ; 679.018,225.407 ccw(c679.788,225.407) CT.1@679.244,224.862 ; 679.018,225.407 ccw(c679.788,225.407) CT.1@679.244,224.862 ; 679.018,225.407 ccw(c679.788,225.407) CT.1@679.244,224.862 ; 679.018,226.382 cw(c680.271,226.382) U3.7@679.385,227.268 ; 679.018,226.382 cw(c680.271,226.382) U3.7@679.385,227.268 ; 679.018,226.382 cw(c680.271,226.382) U3.7@679.385,227.268 ; 679.018,226.382 cw(c680.271,226.382) U3.7@679.385,227.268
NetD1_1: D1.A R1.1 R2.1 R2c.1 | length 72.5
  Top Layer w0.762: D1.A@663.194,227.821 663.183,227.832 663.183,233.923 665.48,236.22 v1(667.512,236.22) 668.274,236.982 R2c.1@669.798,236.982 ; D1.A@662.933,228.082 ccw(c662.33,228.685) 663.183,228.685 ; D1.A@662.933,228.082 ccw(c662.33,228.685) 663.183,228.685 ; D1.A@662.933,228.082 ccw(c662.33,228.685) 663.183,228.685 ; D1.A@662.933,228.082 ccw(c662.33,228.685) 663.183,228.685 ; 663.183,228.739 ccw(c664.111,228.739) D1.A@663.455,228.082 ; 663.183,228.739 ccw(c664.111,228.739) D1.A@663.455,228.082 ; 663.183,228.739 ccw(c664.111,228.739) D1.A@663.455,228.082 ; 663.183,228.739 ccw(c664.111,228.739) D1.A@663.455,228.082 ; 666.259,236.22 cw(c666.259,234.967) v1@667.145,235.853 ; 666.259,236.22 ccw(c666.259,237.473) v1@667.145,236.587 ; 666.259,236.22 ccw(c666.259,237.473) v1@667.145,236.587 ; 666.259,236.22 cw(c666.259,234.967) v1@667.145,235.853 ; 666.259,236.22 ccw(c666.259,237.473) v1@667.145,236.587 ; 666.259,236.22 cw(c666.259,234.967) v1@667.145,235.853 ; 666.259,236.22 ccw(c666.259,237.473) v1@667.145,236.587 ; 666.259,236.22 cw(c666.259,234.967) v1@667.145,235.853 ; v1@667.305,236.347 cw(c668.438,235.653) 668.438,236.982 ; v1@667.305,236.347 cw(c668.438,235.653) 668.438,236.982 ; v1@667.305,236.347 cw(c668.438,235.653) 668.438,236.982 ; v1@667.305,236.347 cw(c668.438,235.653) 668.438,236.982 ; v1@667.955,235.949 cw(c669.798,234.821) R2c.1@669.798,236.982 ; v1@667.955,235.949 cw(c669.798,234.821) R2c.1@669.798,236.982 ; v1@667.955,235.949 cw(c669.798,234.821) R2c.1@669.798,236.982 ; v1@667.955,235.949 cw(c669.798,234.821) R2c.1@669.798,236.982 ; 668.978,236.982 cw(c668.978,236.212) R2c.1@669.522,236.756 ; 668.978,236.982 ccw(c668.978,237.752) R2c.1@669.522,237.208 ; 668.978,236.982 ccw(c668.978,237.752) R2c.1@669.522,237.208 ; 668.978,236.982 cw(c668.978,236.212) R2c.1@669.522,236.756 ; 668.978,236.982 ccw(c668.978,237.752) R2c.1@669.522,237.208 ; 668.978,236.982 cw(c668.978,236.212) R2c.1@669.522,236.756 ; 668.978,236.982 ccw(c668.978,237.752) R2c.1@669.522,237.208 ; 668.978,236.982 cw(c668.978,236.212) R2c.1@669.522,236.756
  Bottom Layer w0.762: R2.1@667.512,234.664 R1.1@669.512,234.664 ; R2.1@667.512,234.696 v1(667.512,236.22) ; v1@667.145,235.853 cw(c666.259,234.967) R2.1@667.512,234.967 ; v1@667.145,235.853 cw(c666.259,234.967) R2.1@667.512,234.967 ; v1@667.145,235.853 cw(c666.259,234.967) R2.1@667.512,234.967 ; v1@667.145,235.853 cw(c666.259,234.967) R2.1@667.512,234.967 ; R2.1@667.286,234.89 ccw(c666.742,235.434) v1@667.512,235.434 ; R2.1@667.286,234.89 ccw(c666.742,235.434) v1@667.512,235.434 ; R2.1@667.286,234.89 ccw(c666.742,235.434) v1@667.512,235.434 ; R2.1@667.286,234.89 ccw(c666.742,235.434) v1@667.512,235.434 ; R2.1@667.512,234.967 cw(c668.765,234.967) v1@667.879,235.853 ; R2.1@667.512,234.967 cw(c668.765,234.967) v1@667.879,235.853 ; R2.1@667.512,234.967 cw(c668.765,234.967) v1@667.879,235.853 ; R2.1@667.512,234.967 cw(c668.765,234.967) v1@667.879,235.853 ; v1@667.512,235.434 ccw(c668.282,235.434) R2.1@667.738,234.89 ; v1@667.512,235.434 ccw(c668.282,235.434) R2.1@667.738,234.89 ; v1@667.512,235.434 ccw(c668.282,235.434) R2.1@667.738,234.89 ; v1@667.512,235.434 ccw(c668.282,235.434) R2.1@667.738,234.89 ; R2.1@667.788,234.438 cw(c668.332,233.894) 668.332,234.664 ; R2.1@667.788,234.438 cw(c668.332,233.894) 668.332,234.664 ; R2.1@667.788,234.438 cw(c668.332,233.894) 668.332,234.664 ; R2.1@667.788,234.438 cw(c668.332,233.894) 668.332,234.664 ; R2.1@667.788,234.89 ccw(c668.332,235.434) 668.332,234.664 ; R2.1@667.788,234.89 ccw(c668.332,235.434) 668.332,234.664 ; R2.1@667.788,234.89 ccw(c668.332,235.434) 668.332,234.664 ; R2.1@667.788,234.89 ccw(c668.332,235.434) 668.332,234.664 ; 669.232,234.664 cw(c669.232,233.894) R1.1@669.776,234.438 ; 669.232,234.664 ccw(c669.232,235.434) R1.1@669.776,234.89 ; 669.232,234.664 ccw(c669.232,235.434) R1.1@669.776,234.89 ; 669.232,234.664 cw(c669.232,233.894) R1.1@669.776,234.438 ; 669.232,234.664 ccw(c669.232,235.434) R1.1@669.776,234.89 ; 669.232,234.664 cw(c669.232,233.894) R1.1@669.776,234.438 ; 669.232,234.664 ccw(c669.232,235.434) R1.1@669.776,234.89 ; 669.232,234.664 cw(c669.232,233.894) R1.1@669.776,234.438
NetD1_2: D1.K P3.1 P3.2 P3.3 P3.4 | length 20.8
  Top Layer w0.762: P3.1@663.194,219.456 D1.K@663.194,225.315 ; P3.1@662.319,219.569 ccw(c660.207,221.681) 663.194,221.681 ; P3.1@662.319,219.569 ccw(c660.207,221.681) 663.194,221.681 ; P3.1@662.319,219.569 ccw(c660.207,221.681) 663.194,221.681 ; P3.1@662.319,219.569 ccw(c660.207,221.681) 663.194,221.681 ; D1.K@662.933,225.054 cw(c662.303,224.424) 663.194,224.424 ; D1.K@662.933,225.054 cw(c662.303,224.424) 663.194,224.424 ; D1.K@662.933,225.054 cw(c662.303,224.424) 663.194,224.424 ; D1.K@662.933,225.054 cw(c662.303,224.424) 663.194,224.424 ; 663.194,224.424 cw(c664.085,224.424) D1.K@663.455,225.054 ; 663.194,224.424 cw(c664.085,224.424) D1.K@663.455,225.054 ; 663.194,224.424 cw(c664.085,224.424) D1.K@663.455,225.054 ; 663.194,224.424 cw(c664.085,224.424) D1.K@663.455,225.054